# EAGLE board Split12VoltForTesting (EAGLE 6.5.0)
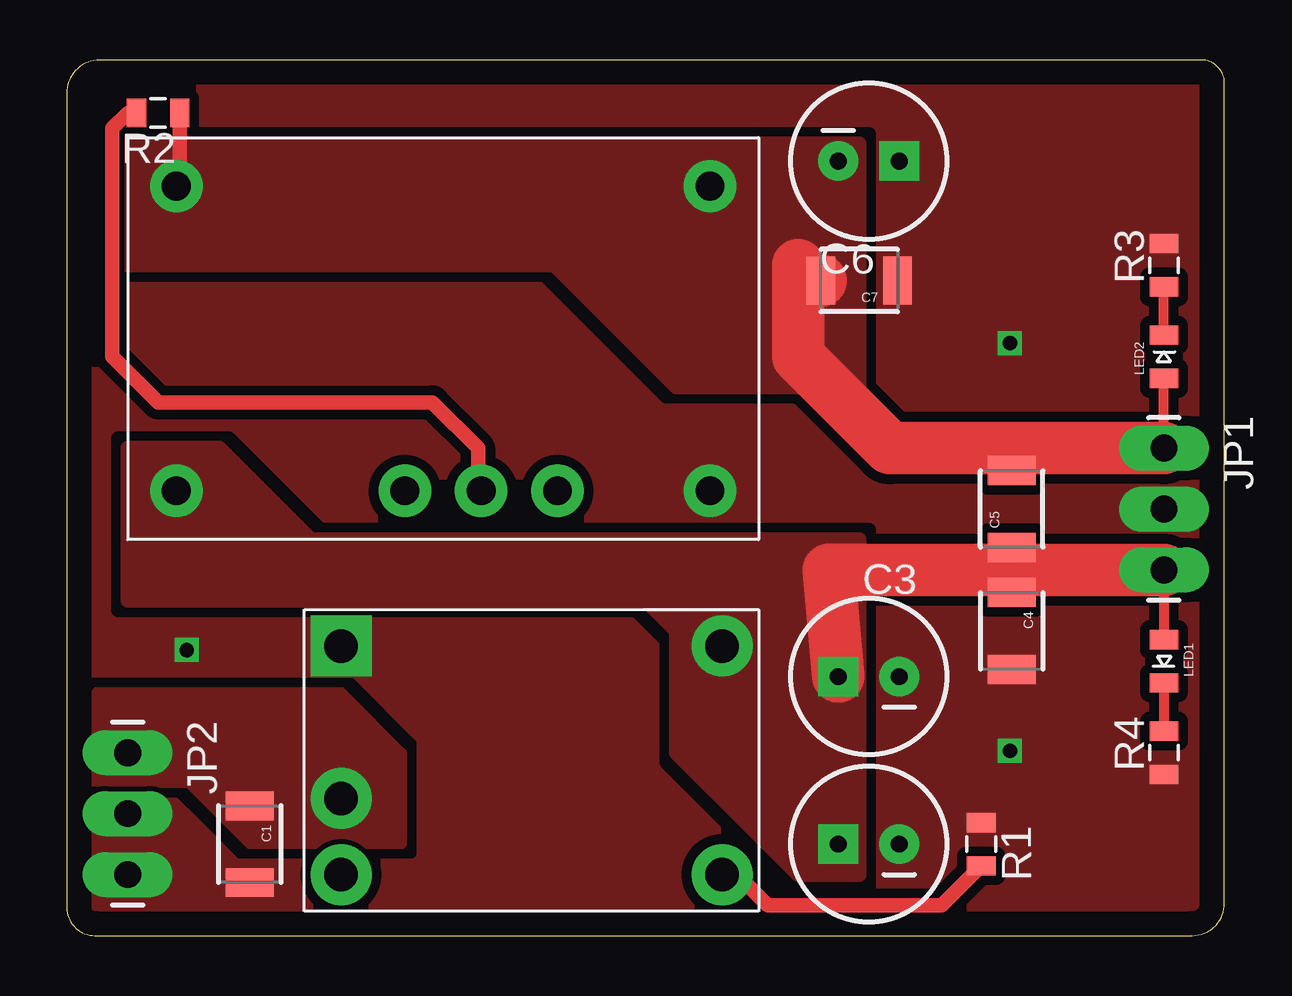
[diagram p0: board, top side]
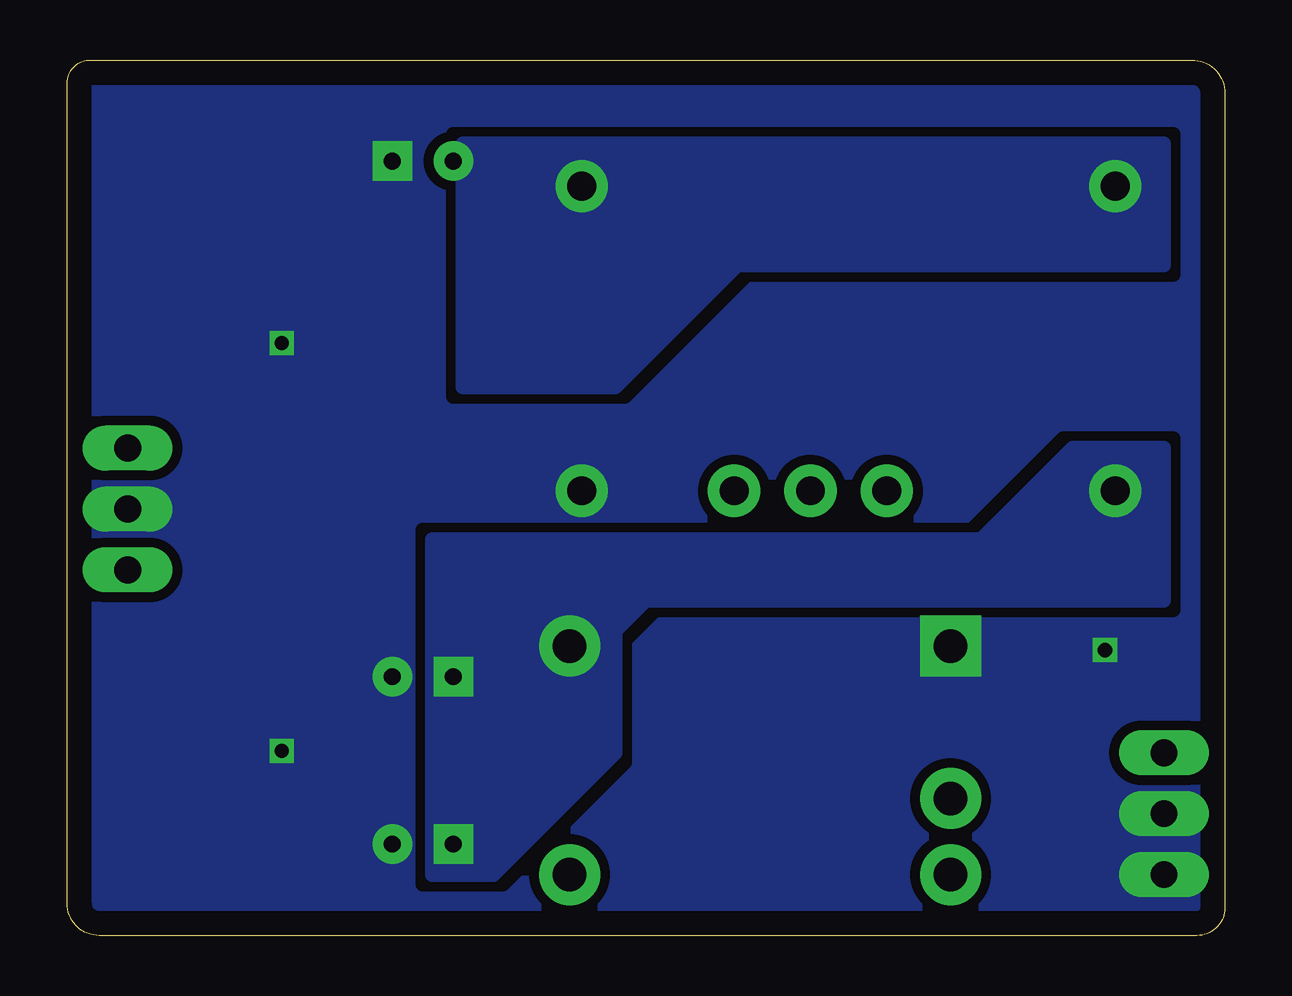
[diagram p1: board, bottom side, seen from below]

Size 48.24 x 36.5 mm. Coordinates in mm from the lower left corner, seen from the top.
Outline: 0,35.11 0,1.17 arc90 1.17,0 46.9,0 arc90 48.24,1.34 48.24,35.53 arc90 47.27,36.5 1.39,36.5 arc90 0,35.11
Copper layers (1*16): Top 0.035mm / dielectric 1.5mm / Bottom 0.035mm
Design rules "default": minimum track width 10mil, minimum drill 24mil, track to track 8mil, track to pad 8mil, pad to pad 8mil, via to via 8mil, smd to smd 8mil, copper to edge 40mil, drill to drill 8mil, minimum pad ring 10mil, minimum via ring 8mil, stop-mask expansion 4mil, vias tented up to drill 0mil, thermal gap 10mil

## Footprints (pad centres in the part's own frame; a part is rotated, then mirrored left to right if it is on the bottom)
1210 = smd 1.2 x 2: 1 -1.6,0; 2 1.6,0
CPOL-RADIAL-100UF-25V = drill 0.7 pad 1.651 square: 1 1.27,0 | drill 0.7 pad 1.651: 2 -1.27,0
1X03_LONGPADS = drill 1.118 pad 1.88 long: 1 0,0; 2 2.54,0; 3 5.08,0
LED-0805 = smd 0.8 x 1.2: 1 -0.9,0; 2 0.9,0
0805 = smd 0.8 x 1.2: 1 -0.9,0; 2 0.9,0
PTN78000 = drill 1.397 pad 2.54: ADJ 15.875,-9.525; INHIBIT 0,-9.525; V_IN 0,-6.35; V_OUT 15.875,0 | drill 1.397 pad 2.54 square: GND 0,0
PTN_EUW = drill 1.2 pad 2.184: 1 2.03,14.73; 2 2.03,2.03; 3 11.55,2.03; 4 14.73,2.03; 5 17.91,2.03; 6 24.26,2.03; 7 24.26,14.73

## Placement (x,y rotation side)
C1  2.2uF  [1210]  7.62,3.81 270 top
C2  100uF  [CPOL-RADIAL-100UF-25V]  33.42,3.81 180 top
C3  100uF  [CPOL-RADIAL-100UF-25V]  33.42,10.79 180 top
C4  2.2uF  [1210]  39.37,12.7 270 top
C5  2.2uF  [1210]  39.37,17.78 90 top
C6  100uF  [CPOL-RADIAL-100UF-25V]  33.42,32.28 0 top
C7  2.2uF  [1210]  33.02,27.3 180 top
JP1  M03LONGPADS  [1X03_LONGPADS]  45.72,20.32 270 top
JP2  M03LONGPADS  [1X03_LONGPADS]  2.54,7.62 270 top
LED1  [LED-0805]  45.72,11.43 270 top
LED2  [LED-0805]  45.72,24.13 90 top
R1  14.9k  [0805]  38.1,3.81 270 top
R2  100  [0805]  3.81,34.29 180 top
R3  1.5k  [0805]  45.72,27.94 90 top
R4  1.5k  [0805]  45.72,7.62 90 top
U$1  PTN78000THROUGH-HOLE  [PTN78000]  11.43,12.06 0 top
U$2  PTN78060A  [PTN_EUW]  2.54,16.51 0 top

## Library data of the parts
C1-C7 JP1 JP2 LED1 LED2 R1-R4 U$1 U$2 = SensorCape

## Nets
GND: C1.2 C2.2 C3.2 C4.2 C6.1 C7.1 JP1.2 JP2.2 JP2.3 R1.1 R3.2 R4.1 U$1.GND U$2.6
N$1: LED2.2 R3.1
N$2: R2.2 U$2.4
N$3: R1.2 U$1.ADJ
N$4: LED1.2 R4.2
V_IN: C1.1 JP2.1 U$1.V_IN
VDD15V0_D: C2.1 C3.1 C4.1 C5.1 JP1.3 LED1.1 U$1.V_OUT U$2.2
VSS15V0_D: C5.2 C6.2 C7.2 JP1.1 LED2.1 R2.1 U$2.1 U$2.7

## Tracks (layer width: path | path; a pad name or v marks a point on that pad's centre or on a via)
GND  (via drill 0.6)
  other vias: 39.3,7.7 39.3,24.7 5,11.9
  pour Top (isolate 0.406, rank 5, no thermals): 0,-1.27 64.77,-1.27 64.77,40.64 0,40.64
  pour Bottom (isolate 0.406, rank 5, no thermals): 0,40.64 0,0.6 arc90 1.87,-1.27 64.77,-1.27 64.77,40.64
N$1
  Top 0.406: LED2.2 R3.1
N$2
  Top 0.61: R2.2 2.54,34.29 1.91,33.66 1.91,24.13 3.81,22.23 15.24,22.23 17.14,20.32 17.14,18.66 U$2.4
N$3
  Top 0.61: U$1.ADJ 27.94,2.54 29.21,1.27 36.46,1.27 R1.2
N$4
  Top 0.406: LED1.2 R4.2
V_IN
  pour Top (no thermals): 1.27,10.16 11.43,10.16 13.97,7.62 13.97,3.81 7.62,3.81 5.08,6.35 0,6.35 0,8.89
VDD15V0_D
  Top 0.406: JP1.3 LED1.1
  Top 0.61: C4.1 39.37,15.24 C5.1
  Top 2.184: JP1.3 39.37,15.24 31.75,15.24 C3.1
  pour Top (rank 3, no thermals): 25.4,12.7 25.4,7.62 30.48,2.54 33.02,2.54 33.02,16.51 10.16,16.51 6.35,20.32 2.54,20.32 2.54,13.97 24.13,13.97
  pour Bottom (rank 3, no thermals): 25.4,12.7 25.4,7.62 30.48,2.54 33.02,2.54 33.02,16.51 10.16,16.51 6.35,20.32 2.54,20.32 2.54,13.97 24.13,13.97
VSS15V0_D
  Top 0.305: C5.2 39.37,20.32
  Top 0.406: JP1.1 LED2.1
  Top 0.61: U$2.1 4.71,31.24 R2.1
  Top 2.184: JP1.1 39.37,20.32 34.29,20.32 30.48,24.13 30.48,27.61 | 30.48,27.94 30.48,27.61 | 30.48,27.61 C7.2
  pour Top (no thermals): 2.54,33.02 33.02,33.02 33.02,22.86 25.4,22.86 20.32,27.94 2.54,27.94
  pour Bottom (no thermals): 2.54,33.02 31.75,33.02 31.75,22.86 25.4,22.86 20.32,27.94 2.54,27.94